# EAGLE board mainBoard (EAGLE 9.5.2)
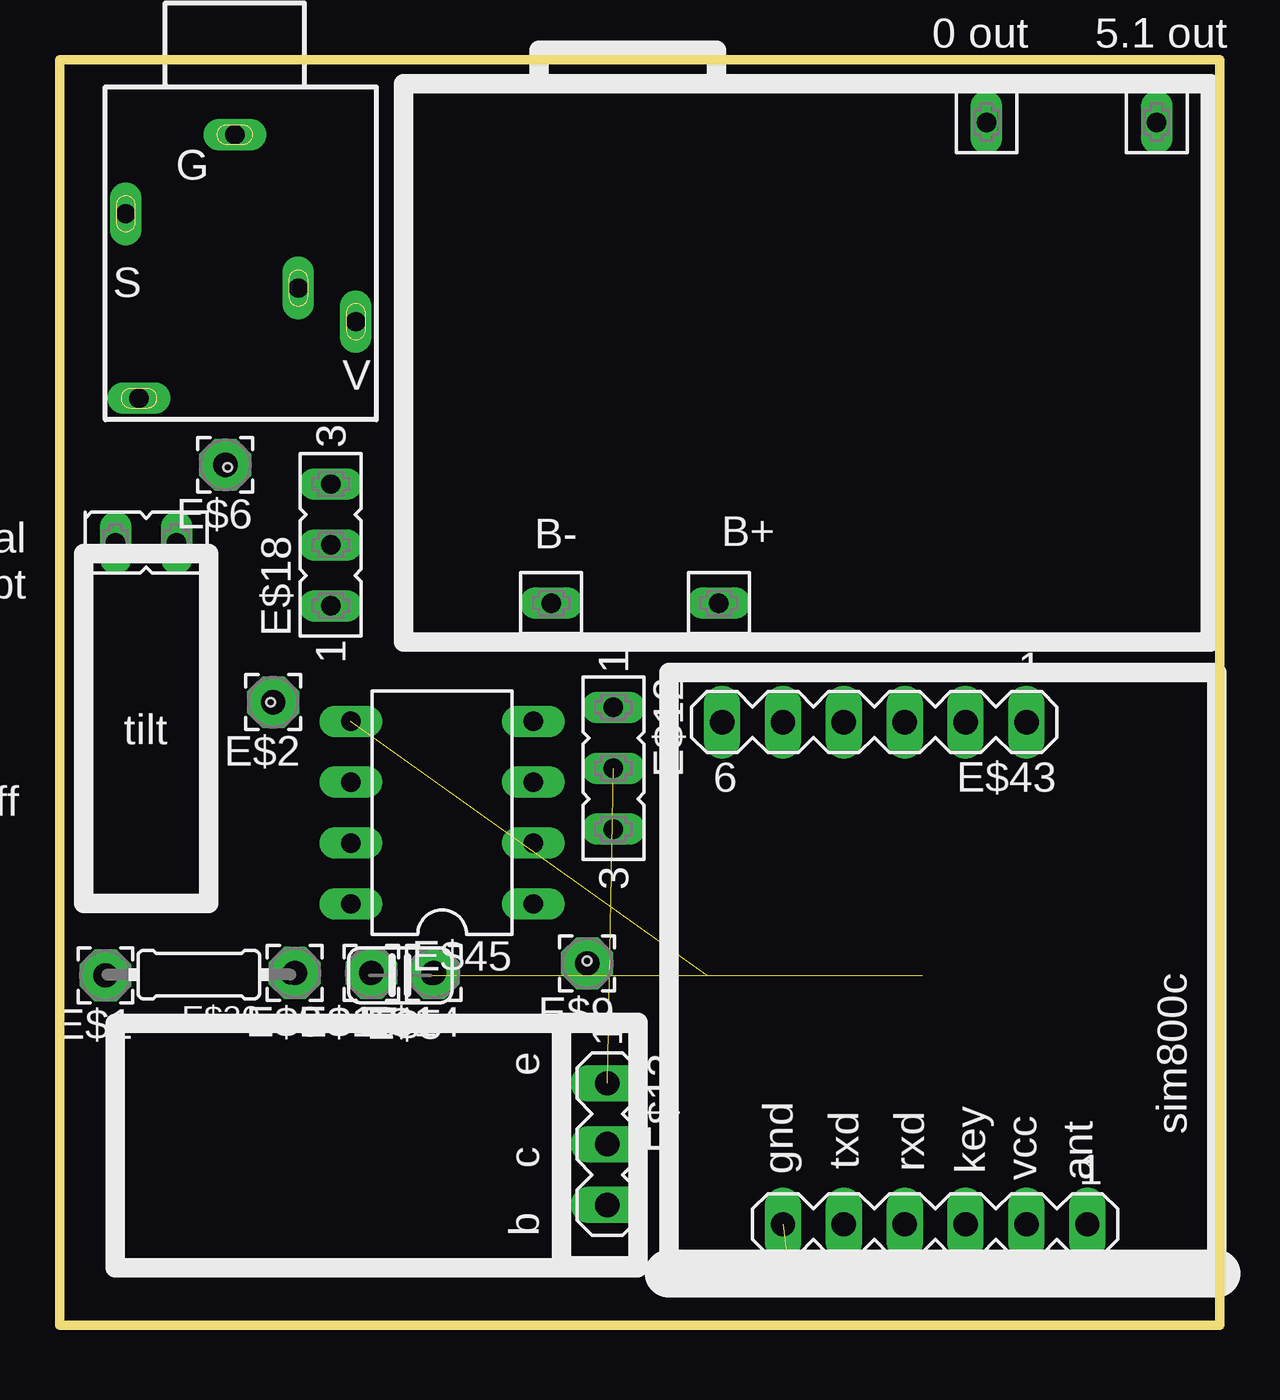
[diagram p0: board, top side]
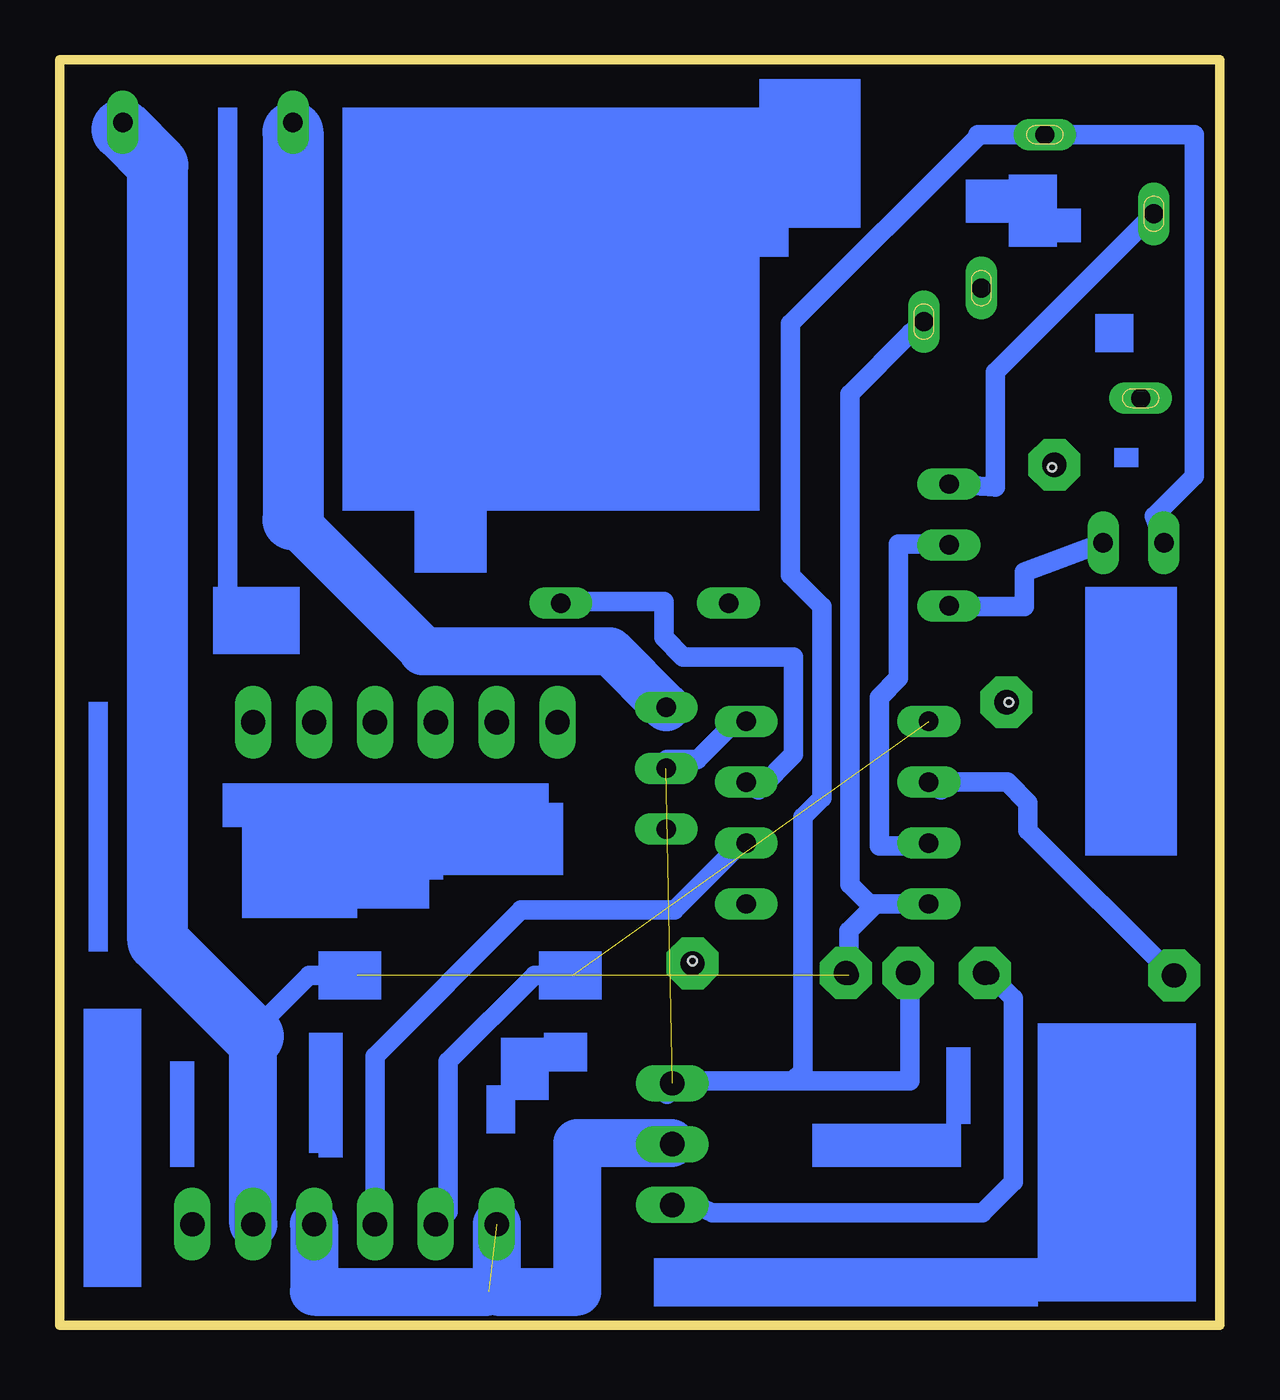
[diagram p1: board, bottom side, seen from below]

Size 48.4 x 52.8 mm. Coordinates in mm from the lower left corner, seen from the top.
Outline: 0,0 48.4,0 48.4,52.8 0,52.8 0,0
Copper layers (1*16): Top 0.035mm / dielectric 1.5mm / Bottom 0.035mm
Design rules "default": minimum track width 10mil, minimum drill 24mil, track to track 8mil, track to pad 8mil, pad to pad 8mil, via to via 8mil, smd to smd 8mil, copper to edge 40mil, drill to drill 8mil, minimum pad ring 10mil, minimum via ring 8mil, stop-mask expansion 4mil, vias tented up to drill 0mil, thermal gap 10mil
Holes 0.35 mm at 8.8,26 7,35.8 22,15.2

## Footprints (pad centres in the part's own frame; a part is rotated, then mirrored left to right if it is on the bottom)
2,15/1,0 = drill 1.016 pad 2.159 octagon: 1 0,0
FE01-1 = drill 0.813 long: 1 -1.27,0
C025-024X044 = drill 0.813 octagon: 1 -1.27,0; 2 1.27,0
1503_09 = drill 0.8 pad 1.2 long: 1 0,-2.1; 2 -4.55,-5.4; 3 5.05,-9.9; 4 -4,-13.1; 5 2.65,-8.5
FE02-1 = drill 0.813 long: 1 -1.27,0; 2 1.27,0
FE03-1 = drill 0.813 long: 1 -5.08,0; 2 -2.54,0; 5 0,0
MA03-1 = drill 1.016 long: 1 -2.54,0; 2 0,0; 3 2.54,0
0204/7 = drill 0.813 octagon: 1 -3.81,0; 2 3.81,0
MA06-1 = drill 1.016 long: 1 -6.35,0; 2 -3.81,0; 3 -1.27,0; 4 1.27,0; 5 3.81,0; 6 6.35,0
DIL08 = drill 0.813 long: 1 -3.81,-3.81; 2 -1.27,-3.81; 3 1.27,-3.81; 4 3.81,-3.81; 5 3.81,3.81; 6 1.27,3.81; 7 -1.27,3.81; 8 -3.81,3.81

## Placement (x,y rotation side)
E$1  [2,15/1,0]  1.9,14.6 180 top
E$2  [2,15/1,0]  8.9,26 180 top
E$3  [FE01-1]  44.5,50.2 180 top
E$4  [FE01-1]  37.4,50.2 180 top
E$5  [C025-024X044]  14.2,14.6 180 top
E$6  [2,15/1,0]  6.9,35.9 180 top
E$7  [1503_09]  7.3,51.78 0 top
E$8  [2,15/1,0]  9.8,14.7 180 top
E$9  [2,15/1,0]  22,15.1 180 top
E$10  [2,15/1,0]  13,14.7 180 top
E$11  [FE02-1]  3.6,32.66 180 top
E$12  [FE03-1]  23.1,20.7 270 top
E$13  TIP 122  [MA03-1]  22.85,7.55 270 top
E$14  [2,15/1,0]  15.6,14.7 180 top
E$15  [FE01-1]  20.5,31.4 90 top
E$16  [FE01-1]  27.5,31.4 90 top
E$17  [2,15/1,0]  13,14.7 180 top
E$18  [FE03-1]  11.3,35.1 90 top
E$20  1k  [0204/7]  5.8,14.63 180 top
E$42  [MA06-1]  36.52,4.21 180 top
E$43  [MA06-1]  33.98,25.17 180 top
E$45  [DIL08]  15.95,21.39 90 top

## Library data of the parts
E$1 E$2 E$6 E$8-E$10 E$14 E$17 = wirepad
E$3 E$4 E$11 E$12 E$15 E$16 E$18 = con-lsta2
E$5 = rcl
E$7 = con-lumberg
E$13 E$42 E$43 = con-lstb
E$20 = eagle-ltspice
E$45 = 74xx-us

## Nets
S$2: E$16.1 E$45.3
S$3: E$42.5 E$45.5
S$4: E$5.2 E$7.1 E$11.2 E$12.2 E$13.1 E$45.4
S$5: E$20.2 E$45.6
S$8: E$11.1 E$18.1
S$9: E$18.2 E$45.7
S$10: E$7.2 E$18.5
S$11: E$13.3 E$20.1
S$13: E$4.1 E$12.1
S$14: E$13.2 E$42.3 E$42.6
S$15: E$3.1 E$5.1 E$7.3 E$42.2 E$45.8
S$16: E$42.4 E$45.2

## Tracks (layer width: path | path; a pad name or v marks a point on that pad's centre or on a via)
S$2
  Bottom 0.254: 27.43,30.2 E$16.1
  Bottom 0.813: E$45.3 19.25,22.34 17.78,23.81 17.78,27.89 22.4,27.89 23.2,28.69 23.2,30.2 27.43,30.2
S$3  (1 unrouted)
  Bottom 0.813: E$42.5 32.2,4.73 32.2,11 28.6,14.6 27,14.6
S$4  (1 unrouted)
  Bottom 0.813: E$11.2 2.74,33.77 1.07,35.44 1.07,49.68 E$7.1 10.09,49.68 10.06,49.64 17.91,41.79 17.91,31.31 16.6,30 16.6,22 17.4,21.2 17.4,10.6 17.8,10.2 | E$45.4 20.52,24.88 21.79,23.61 23.06,23.61 E$12.2 | 17.8,10.2 22.74,10.2 E$13.1 23.06,9.64 | 17.8,10.2 12.93,10.2 E$5.2
S$5
  Bottom 0.813: 11.63,22.34 E$45.6 8.86,22.66 8,21.8 8,20.64 E$20.2
S$8
  Bottom 0.813: E$11.1 8.15,31.43 8.15,30 11.28,30 E$18.1
S$9
  Bottom 0.813: E$45.7 12.21,20.12 12.5,20 14.2,20 14.2,26.2 13.4,27 13.4,32.6 11.34,32.6 E$18.2
S$10
  Bottom 0.813: E$7.2 9.36,39.78 9.36,34.98 E$18.5
S$11
  Bottom 0.813: E$13.3 21.92,5.02 21.16,4.69 9.91,4.69 8.61,5.99 8.61,13.63 E$20.1
S$13
  Bottom 0.813: 33.25,28.18 33.25,28.13 | E$4.1 38.67,49.8
  Bottom 2: 33.25,28.13 25.45,28.13 E$12.1 | 38.67,33.6 33.25,28.18
  Bottom 2.54: 38.67,49.8 38.67,33.6
S$14  (1 unrouted)
  Bottom 0.813: 37.79,1.41 37.78,1.4 | E$13.2 22.89,7.6
  Bottom 2: E$42.6 30.17,1.4 26.8,1.4 26.8,7.6 22.89,7.6 | E$42.3 37.79,1.41 | 37.78,1.4 30.52,1.4
S$15  (1 unrouted)
  Bottom 0.813: E$7.3 12.9,41.39 15.44,38.85 15.44,18.4 14.62,17.58 E$45.8 14.34,17.58 15.47,16.45 E$5.1 | E$42.2 40.33,12.05 | 36,14.6 38,14.6 40.33,12.27
  Bottom 1.016: 45.81,49.9 E$3.1
  Bottom 2: E$42.2 40.33,12.27
  Bottom 2.54: 45.81,49.9 44.31,48.4 44.31,16.03 40.33,12.05
S$16
  Bottom 0.813: E$45.2 19.96,20.12 22.76,17.32 29.16,17.32 35.25,11.23 E$42.4
(copper drawn outside any net)
  shapes: Bottom area x33

## Text on the board
tPlace: 0 out | 5.1 out | G | S | V | switch tilt or external / interrupt | B+ | B- | tilt | switch on off | sim800c | e | gnd | txd | rxd | key | vcc | ant | c | b